# EAGLE board PAD05 (EAGLE 8.3.2)
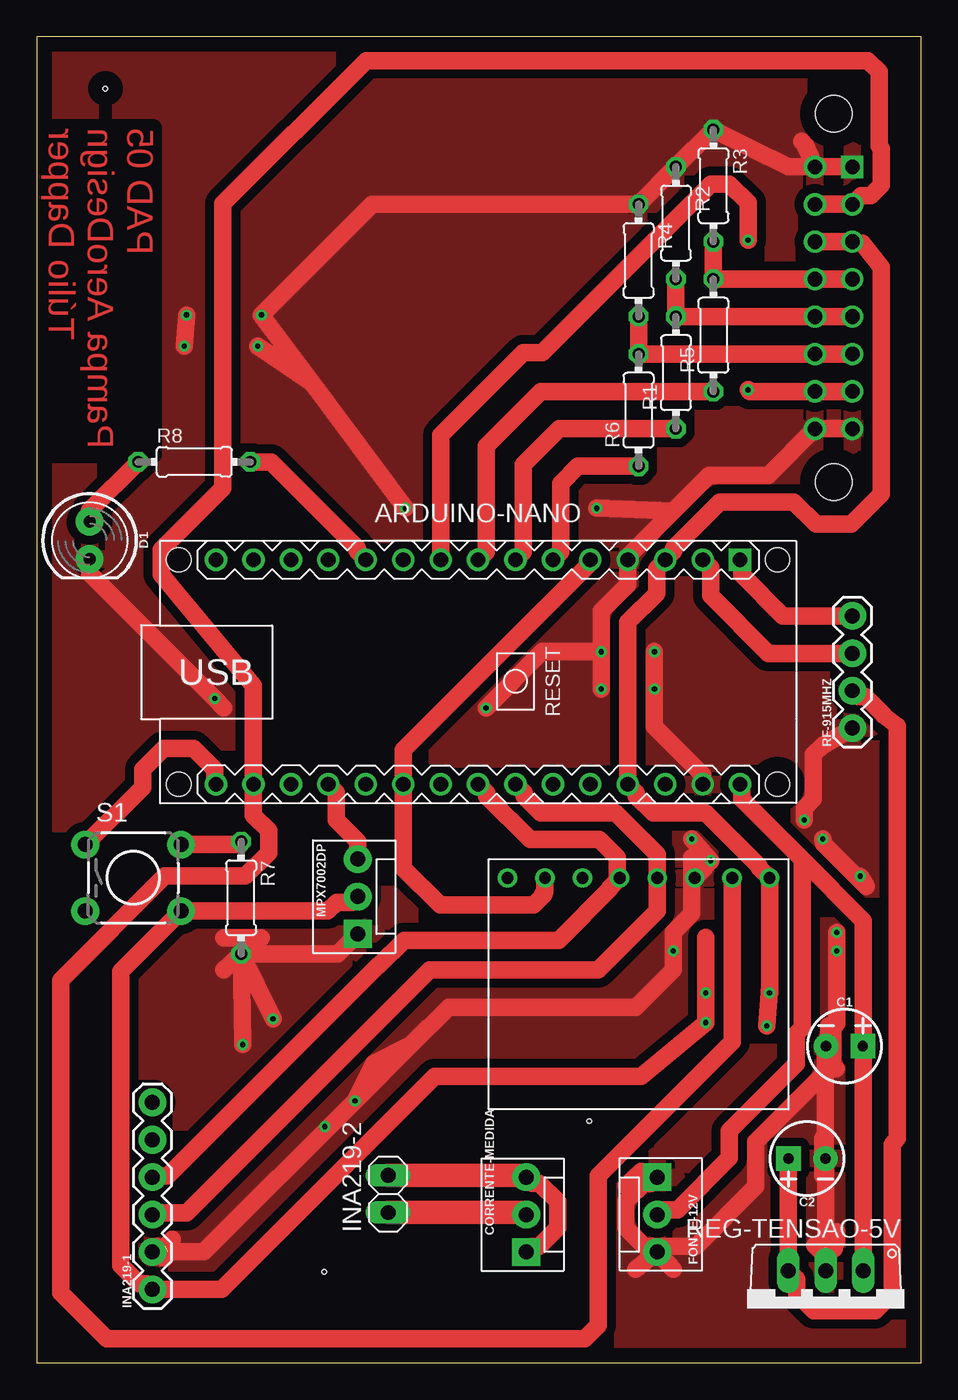
[diagram p0: board, top side]
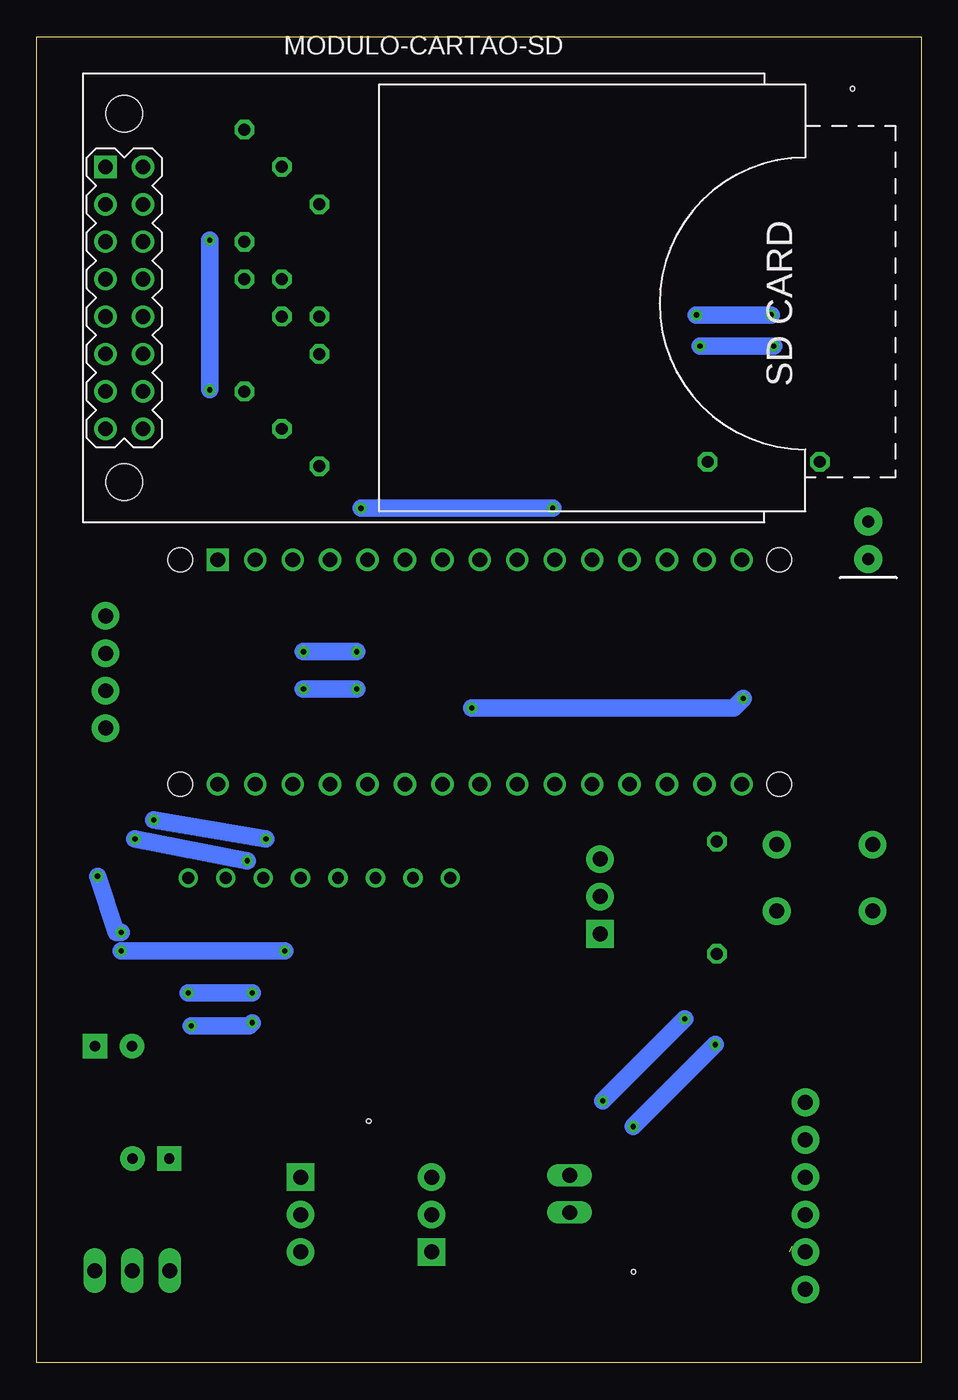
[diagram p1: board, bottom side, seen from below]

Size 60 x 90 mm. Coordinates in mm from the lower left corner, seen from the top.
Outline: 0,0 60,0 60,90 0,90 0,0
Copper layers (1*16): Top 0.035mm / dielectric 1.5mm / Bottom 0.035mm
Design rules "default *": minimum track width 1.2mm, minimum drill 0.35mm, track to track 0.6mm, track to pad 0.6mm, pad to pad 0.6mm, via to via 0.6mm, smd to smd 6mil, copper to edge 40mil, drill to drill 6mil, minimum pad ring 10mil, minimum via ring 8mil, stop-mask expansion 4mil, vias tented up to drill 0mil, thermal gap 10mil
Net classes: 0 default: width 1 mm, drill 1 mm, clearance 0.025 mm
Holes 0.3 mm at 19.51,6.16 37.48,16.4 4.65,86.49

## Footprints (pad centres in the part's own frame; a part is rotated, then mirrored left to right if it is on the bottom)
ARDUINO-NANO-3.0 = drill 1 square: J1.1 17.78,7.62 | drill 1: J1.2 15.24,7.62; J1.3 12.7,7.62; J1.4 10.16,7.62; J1.5 7.62,7.62; J1.6 5.08,7.62; J1.7 2.54,7.62; J1.8 0,7.62; J1.9 -2.54,7.62; J1.10 -5.08,7.62; J1.11 -7.62,7.62; J1.12 -10.16,7.62; J1.13 -12.7,7.62; J1.14 -15.24,7.62; J1.15 -17.78,7.62; J2.1 17.78,-7.62; J2.2 15.24,-7.62; J2.3 12.7,-7.62; J2.4 10.16,-7.62; J2.5 7.62,-7.62; J2.6 5.08,-7.62; J2.7 2.54,-7.62; J2.8 0,-7.62; J2.9 -2.54,-7.62; J2.10 -5.08,-7.62; J2.11 -7.62,-7.62; J2.12 -10.16,-7.62; J2.13 -12.7,-7.62; J2.14 -15.24,-7.62; J2.15 -17.78,-7.62 | hole 1.651: -20.32,7.62; -20.32,-7.62; 20.32,-7.62; 20.32,7.62
CPOL-RADIAL-2.5MM-5MM = drill 0.7 pad 1.651 square: 1 1.25,0 | drill 0.7 pad 1.651: 2 -1.25,0
MOLEX-1X3 = drill 1.016 pad 1.88 square: 1 0,0 | drill 1.016 pad 1.88: 2 2.54,0; 3 5.08,0
LED_5MM = drill 0.813 pad 1.88: A -1.27,0; K 1.27,0
GY-86 = drill 0.8: 1 1.27,19.05; 2 1.27,16.51; 3 1.27,13.97; 4 1.27,11.43; 5 1.27,8.89; 6 1.27,6.35; 7 1.27,3.81; 8 1.27,1.27
1X06 = drill 1.016 pad 1.88: 1 0,0; 2 2.54,0; 3 5.08,0; 4 7.62,0; 5 10.16,0; 6 12.7,0
1X02 = drill 1.016 long: 1 -1.27,0; 2 1.27,0
CARD-SD-ADAPTER = drill 1 square: 1 -21.59,8.89 | drill 1: 2 -19.05,8.89; 3 -21.59,6.35; 4 -19.05,6.35; 5 -21.59,3.81; 6 -19.05,3.81; 7 -21.59,1.27; 8 -19.05,1.27; 9 -21.59,-1.27; 10 -19.05,-1.27; 11 -21.59,-3.81; 12 -19.05,-3.81; 13 -21.59,-6.35; 14 -19.05,-6.35; 15 -21.59,-8.89; 16 -19.05,-8.89 | hole 2.5: -20.32,12.5; -20.32,-12.5
0204/7 = drill 0.813 octagon: 1 -3.81,0; 2 3.81,0
TO220V = drill 1.016 long: 1 -2.54,-2.54; 2 0,-2.54; 3 2.54,-2.54
1X04 = drill 1.016 pad 1.88: 1 0,0; 2 2.54,0; 3 5.08,0; 4 7.62,0
TACTILE-PTH = drill 1.016 pad 1.88: 1 -3.251,2.261; 2 3.251,2.261; 3 -3.251,-2.261; 4 3.251,-2.261

## Placement (x,y rotation side)
ARDUINO-NANO  [ARDUINO-NANO-3.0]  29.94,46.88 0 top
C1  10uF  [CPOL-RADIAL-2.5MM-5MM]  54.8,21.48 0 top
C2  10uF  [CPOL-RADIAL-2.5MM-5MM]  52.26,13.86 180 top
CORRENTE-MEDIDA  [MOLEX-1X3]  33.21,7.51 90 top
D1  [LED_5MM]  3.58,55.82 270 top
FONTE-12V  [MOLEX-1X3]  42.1,12.59 270 top
GY-87  [GY-86]  30.67,34.18 270 top
INA219-1  [1X06]  7.84,4.97 90 top
INA219-2  [1X02]  23.84,11.46 90 top
MODULO-CARTAO-SD  [CARD-SD-ADAPTER]  33.75,72.28 0 bottom
MPX7002DP  [MOLEX-1X3]  21.78,29.1 90 top
R1  220  [0204/7]  43.37,67.2 90 top
R2  330  [0204/7]  43.37,77.36 270 top
R3  330  [0204/7]  45.91,79.9 270 top
R4  330  [0204/7]  40.83,74.82 270 top
R5  220  [0204/7]  45.91,69.74 90 top
R6  220  [0204/7]  40.83,64.66 90 top
R7  1k  [0204/7]  13.86,31.56 270 top
R8  1k  [0204/7]  10.68,61.15 0 top
REG-TENSAO-5V  7805TV  [TO220V]  53.53,3.7 180 top
RF-915MHZ  [1X04]  55.34,43.07 90 top
S1  [TACTILE-PTH]  6.54,32.91 0 top

## Library data of the parts
ARDUINO-NANO MODULO-CARTAO-SD = diy-modules
C1 C2 = SparkFun-Capacitors; PROD_ID: CAP-08440
CORRENTE-MEDIDA FONTE-12V MPX7002DP = SparkFun-Connectors; PROD_ID: CONN-08625; SF_ID: PRT-08096
D1 = SparkFun-LED
GY-87 = GY_Boards
INA219-1 = SparkFun-Connectors; PROD_ID: CONN-08437
INA219-2 = pinhead
R1-R8 = resistor
REG-TENSAO-5V = linear
RF-915MHZ = SparkFun-Connectors; PROD_ID: CONN-09696
S1 = SparkFun-Retired

## Nets
3.3V: ARDUINO-NANO.J2.14 GY-87.2 MODULO-CARTAO-SD.3 MODULO-CARTAO-SD.4
5V: ARDUINO-NANO.J1.3 ARDUINO-NANO.J2.4 GY-87.1 INA219-1.1 MODULO-CARTAO-SD.5 MODULO-CARTAO-SD.6 MPX7002DP.2 S1.4
5V_2: C2.1 REG-TENSAO-5V.3 RF-915MHZ.2
A0: ARDUINO-NANO.J2.12 MPX7002DP.3
BUT1: ARDUINO-NANO.J2.15 S1.1
CS: MODULO-CARTAO-SD.7 MODULO-CARTAO-SD.8 R3.2 R5.2
CS_2: ARDUINO-NANO.J1.8 R5.1
GND: ARDUINO-NANO.J1.4 ARDUINO-NANO.J2.2 C1.2 C2.2 D1.K FONTE-12V.1 FONTE-12V.3 GY-87.3 INA219-1.2 MODULO-CARTAO-SD.1 MODULO-CARTAO-SD.2 MODULO-CARTAO-SD.15 MODULO-CARTAO-SD.16 MPX7002DP.1 R2.1 R3.1 R4.1 R7.2 REG-TENSAO-5V.2 RF-915MHZ.1
I+: CORRENTE-MEDIDA.2 INA219-2.1
I-: CORRENTE-MEDIDA.1 CORRENTE-MEDIDA.3 INA219-2.2
INTA: ARDUINO-NANO.J1.5 ARDUINO-NANO.J2.10 GY-87.7
LED1: ARDUINO-NANO.J1.11 R8.2
MISO: ARDUINO-NANO.J1.9 MODULO-CARTAO-SD.13 MODULO-CARTAO-SD.14
MOSI: MODULO-CARTAO-SD.9 MODULO-CARTAO-SD.10 R1.2 R2.2
MOSI_2: ARDUINO-NANO.J1.7 R1.1
N$1: R7.1 S1.2
N$2: D1.A R8.1
RX: ARDUINO-NANO.J1.2 RF-915MHZ.3
SCK: MODULO-CARTAO-SD.11 MODULO-CARTAO-SD.12 R4.2 R6.2
SCK_2: ARDUINO-NANO.J1.6 R6.1
SCL: ARDUINO-NANO.J2.7 GY-87.4 INA219-1.3
SDA: ARDUINO-NANO.J2.8 GY-87.5 INA219-1.4
TX: ARDUINO-NANO.J1.1 RF-915MHZ.4
VIN: ARDUINO-NANO.J2.1 C1.1 FONTE-12V.2 REG-TENSAO-5V.1

## Tracks (layer width: path | path; a pad name or v marks a point on that pad's centre or on a via)
3.3V
  Top 1.2: GY-87.2 47.18,21.78 38.1,12.7 38.1,2.54 37.18,1.62 4.73,1.62 1.62,4.73 1.62,25.95 8.7,33.03 14.15,33.03 15.72,34.6 15.72,36.14 14.7,37.16 ARDUINO-NANO.J2.14 14.7,45.97 8.45,53.49 8.45,55.2 12.63,59.38 12.63,78.67 22.34,88.38 56.4,88.38 57.15,87.63 57.15,82.56 57.29,82.42 57.29,79.92 56.59,79.22 55.93,79.22 MODULO-CARTAO-SD.3 MODULO-CARTAO-SD.4
5V  (via drill 0.35)
  Top 1.2: MPX7002DP.2 21.38,31.24 20.34,31.24 19.75,30.65 S1.4 5.7,26.56 5.7,6.62 6.96,5.37 7.44,5.37 INA219-1.1 12.55,4.97 27.01,19.44 41.03,19.44 v45.38,23.08 v45.38,25.09 45.38,28.86 | v49.53,22.86 49.72,25.59 | 49.72,25.59 GY-87.1 49.03,33.6 49.03,33.68 45.41,37.31 41.83,37.31 40.69,38.45 40.69,38.67 ARDUINO-NANO.J2.4 40.1,50.26 42.05,52.21 42.05,53.91 ARDUINO-NANO.J1.3 43.23,55.09 43.23,55.31 46.34,58.42 51.38,58.42 52.88,56.91 55.26,56.91 57.29,58.95 57.29,74.36 56,76 MODULO-CARTAO-SD.5 MODULO-CARTAO-SD.6 | 49.72,25.59 v49.72,25.09
  Bottom 1.2: v49.53,22.86 45.6,22.86 v45.38,23.08 | v45.38,25.09 v49.72,25.09
5V_2
  Top 1.2: C2.1 50.99,13.84 REG-TENSAO-5V.3 51.57,5.66 51.57,4.67 52.72,3.52 56.88,3.52 58.03,4.67 58.03,14.81 58.38,15.24 58.38,43.21 57.48,43.92 57.48,43.96 56.23,45.21 | 56.23,45.21 55.74,45.21 | RF-915MHZ.2 55.85,45.21 56.23,45.21
A0
  Top 1.2: MPX7002DP.3 21.78,35.37 20.32,36.83 20.32,38.72 ARDUINO-NANO.J2.12
BUT1
  Top 1.2: ARDUINO-NANO.J2.15 12.06,39.36 12.06,40.27 10.63,41.7 8.61,41.7 7.18,40.27 7.18,39.06 S1.1
CS
  Top 1.2: R3.2 R5.2 MODULO-CARTAO-SD.8 MODULO-CARTAO-SD.7
CS_2
  Top 1.2: R5.1 34.18,65.93 30.48,62.23 30.48,55.04 ARDUINO-NANO.J1.8
GND  (via drill 0.35)  (1 unrouted)
  Top 1.2: C2.2 53.51,21.44 C1.2 | C2.2 53.53,13.84 REG-TENSAO-5V.2 53.37,6.39 53.37,7.4 52.79,7.98 54.11,7.72 54.11,7.82 54.27,8.19 54.27,8.89 | FONTE-12V.3 42.5,7.91 44.75,7.91 48.79,11.95 48.79,14.99 53.55,19.75 C1.2 | R7.2 20.43,27.75 MPX7002DP.1 | ARDUINO-NANO.J2.2 45.18,39.91 41.91,43.18 v41.91,45.72 | v41.91,48.26 v41.91,45.72 | v38.3,48.26 38.3,51.01 40.1,52.81 ARDUINO-NANO.J1.4 40.25,54.65 40.25,54.88 43.19,57.81 | v38.3,48.26 v38.3,45.72 | v41.9,45.72 v41.91,45.72 | GY-87.3 44.45,32.72 44.45,30.48 43.18,29.21 v43.18,27.94 43.18,26.67 40.64,24.13 27.94,24.13 25.4,21.59 | v21.59,17.78 11.32,7.51 8.91,7.51 | v21.59,17.78 25.4,21.59 | v54.27,29.21 v54.27,27.94 54.27,23.05 54.02,22.8 54.02,20.96 | GY-87.3 45.33,33.6 45.33,33.68 v45.72,34.07 v44.45,35.56 | v53.34,35.56 53.39,35.22 56.28,32.34 v55.88,33.02 | 25.4,21.59 22.87,20.33 22.86,20.32 v21.59,17.78 | v16.03,23.34 R7.2 | R7.2 v13.97,21.59 | RF-915MHZ.1 53.34,41.91 52.7,41.27 52.7,38.25 52.07,37.62 v52.07,36.83 | 12.7,26.67 R7.2 | R7.2 13.94,28.85 | 13.94,28.85 12.7,28.85 | 13.94,28.85 15.24,28.85 | INA219-1.2 8.15,7.17 8.67,7.17 8.73,7.11 8.51,7.11 INA219-1.2 | INA219-1.2 8.15,7.91 | 8.73,7.91 9.18,8.36 | 43.18,6.35 FONTE-12V.3 | FONTE-12V.3 40.64,6.35 | C2.2 53.34,15.24 53.34,12.7 | C1.2 54.02,20.96 | 54.02,20.96 54.02,20.16 54.24,19.95 | C1.2 53.51,21.76 53.72,21.97 53.72,22.86 | GY-87.3 44.45,33.02 44.45,34.29 | 43.19,57.81 45.59,60.22 49.63,60.22 MODULO-CARTAO-SD.16 MODULO-CARTAO-SD.15 | MODULO-CARTAO-SD.2 50.99,81.17 R3.1 R2.1 R4.1 22.75,78.63 v15.24,71.12 18.68,66.5 | MODULO-CARTAO-SD.2 MODULO-CARTAO-SD.1 | D1.K 3.58,53.57 v12.06,45.09 12.7,44.45
  Top 1.2: v38.3,48.26 34.29,48.26 v30.48,44.45 | FONTE-12V.3 41.7,7.91 41.21,7.91 39.96,9.16 39.96,10.94 41.21,12.19 41.7,12.19 FONTE-12V.1 41,13 40,12 | 18.68,66.5 v25,58 | v38,58 43.19,57.81 | v10.16,71.12 v10,69 | v15,69 18.68,66.5 | MODULO-CARTAO-SD.2 52.16,82.64 51.9,82.9
  Bottom 1.2: v38.3,45.72 v41.91,45.72 | v41.91,48.26 v38.3,48.26 | v55.88,33.02 54.61,29.21 v54.27,29.21 | v54.27,27.94 v43.18,27.94 | v16.03,23.34 v21.59,17.78 | v13.97,21.59 v19.53,16.03 | v30.48,44.45 12.7,44.45 v12.06,45.09 | v15.24,71.12 v10.16,71.12 | v44.45,35.56 v52.07,36.83 | v45.72,34.07 v53.34,35.56 | v25,58 v38,58 | v10,69 v15,69
  pour Top: -5.08,91.44 -5.08,-2.54 63.5,-2.54 63.5,91.44
I+
  Top 1.6: INA219-2.1 33.07,10.19 CORRENTE-MEDIDA.2
I-
  Top 1.2: CORRENTE-MEDIDA.3 33.61,12.19 34.1,12.19 35.35,10.94 35.35,9.16 34.1,7.91 33.61,7.91 CORRENTE-MEDIDA.1
  Top 1.6: INA219-2.2 33.07,12.73 CORRENTE-MEDIDA.3
INTA
  Top 1.2: GY-87.7 34.48,31.94 34.29,31.75 34.4,31.75 33.71,31.06 27.36,31.06 24.86,33.56 ARDUINO-NANO.J2.10 24.86,41.58 37.36,54.08 37.36,54.3 ARDUINO-NANO.J1.5
LED1
  Top 1.2: ARDUINO-NANO.J1.11 21.73,55.09 21.73,55.31 15.89,61.15 R8.2
MISO  (via drill 0.35)
  Top 1.2: ARDUINO-NANO.J1.9 27.4,62.96 33.02,68.58 34.29,68.58 45.72,80.01 46.99,80.01 48.26,78.74 v48.26,76.2 | MODULO-CARTAO-SD.13 MODULO-CARTAO-SD.14 48.37,65.93 v48.26,66.04
  Bottom 1.2: v48.26,76.2 v48.26,66.04
MOSI
  Top 1.2: R2.2 R1.2 MODULO-CARTAO-SD.10 MODULO-CARTAO-SD.9
MOSI_2
  Top 1.2: R1.1 35.45,63.39 33.02,60.96 33.02,55.04 ARDUINO-NANO.J1.7
N$1
  Top 1.2: S1.2 13.66,35.17 R7.1
N$2
  Top 1.2: D1.A 3.58,57.86 R8.1
RX
  Top 1.2: RF-915MHZ.3 49.64,48.15 45.72,52.07 45.72,53.96 ARDUINO-NANO.J1.2
SCK
  Top 1.2: R4.2 R6.2 MODULO-CARTAO-SD.12 MODULO-CARTAO-SD.11
SCK_2
  Top 1.2: R6.1 36.72,60.85 35.56,59.69 35.56,55.04 ARDUINO-NANO.J1.6
SCL
  Top 1.2: ARDUINO-NANO.J2.7 33.07,38.67 33.07,38.45 34.21,37.31 39.28,37.31 42.1,34.49 GY-87.4 42.1,30.68 41.38,29.96 41.38,29.95 38.1,26.67 26.67,26.67 10.16,10.16 7.95,10.16 INA219-1.3
SDA
  Top 1.2: ARDUINO-NANO.J2.8 30.53,38.67 30.53,38.45 33.47,35.51 38.15,35.51 39.37,34.29 39.37,33.1 GY-87.5 38.87,32.22 38.87,32.14 35.41,28.68 24.94,28.68 23.22,26.96 23.15,26.96 8.89,12.7 7.95,12.7 INA219-1.4
TX
  Top 1.2: ARDUINO-NANO.J1.1 47.82,54.4 47.82,53.49 50.62,50.69 RF-915MHZ.4
VIN
  Top 1.2: 56.07,21.46 REG-TENSAO-5V.1 | C1.1 56.07,21.46 | ARDUINO-NANO.J2.1 47.82,39.16 47.82,38.25 51.92,34.14 | 56.07,21.46 56.07,30 51.92,34.14 | FONTE-12V.2 42.44,10.39 43.48,10.39 46.99,13.9 46.99,15.73 51.52,20.27 51.52,22.32 51.92,22.72 51.92,34.14

## Text on the board
Top: PAD 05 / Pampa AeroDesign / Túlio Dapper